# Altium PCB Main.PcbDoc (part 1 of 2)
Units mm, origin at the board's own origin, x right, y up, seen from the top; angles counter-clockwise.
Board outline 112.5 x 86 mm, 4 copper layers (Top Layer, Layer 2, Layer 3, Bottom Layer), stack 1.334 mm thick; 103 components, 96 nets, 354 pads, 15 vias.
Unrouted connection lines stored in the file: 144.
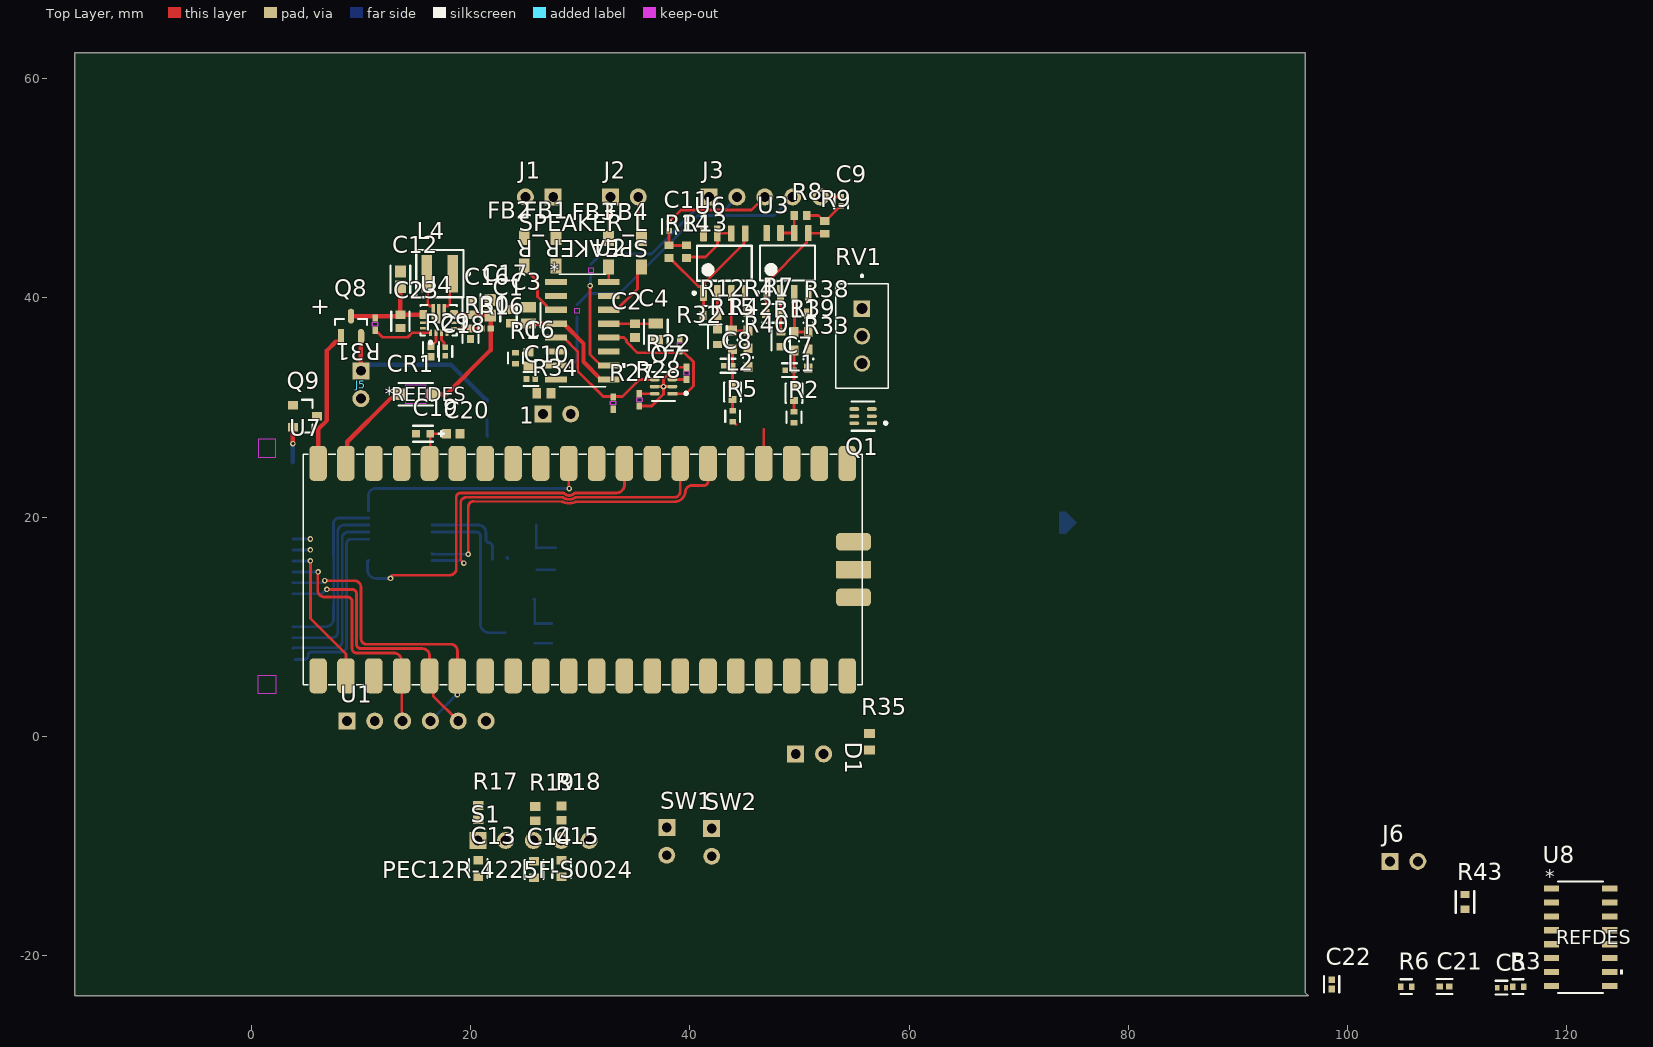
[diagram p0: Top Layer view]
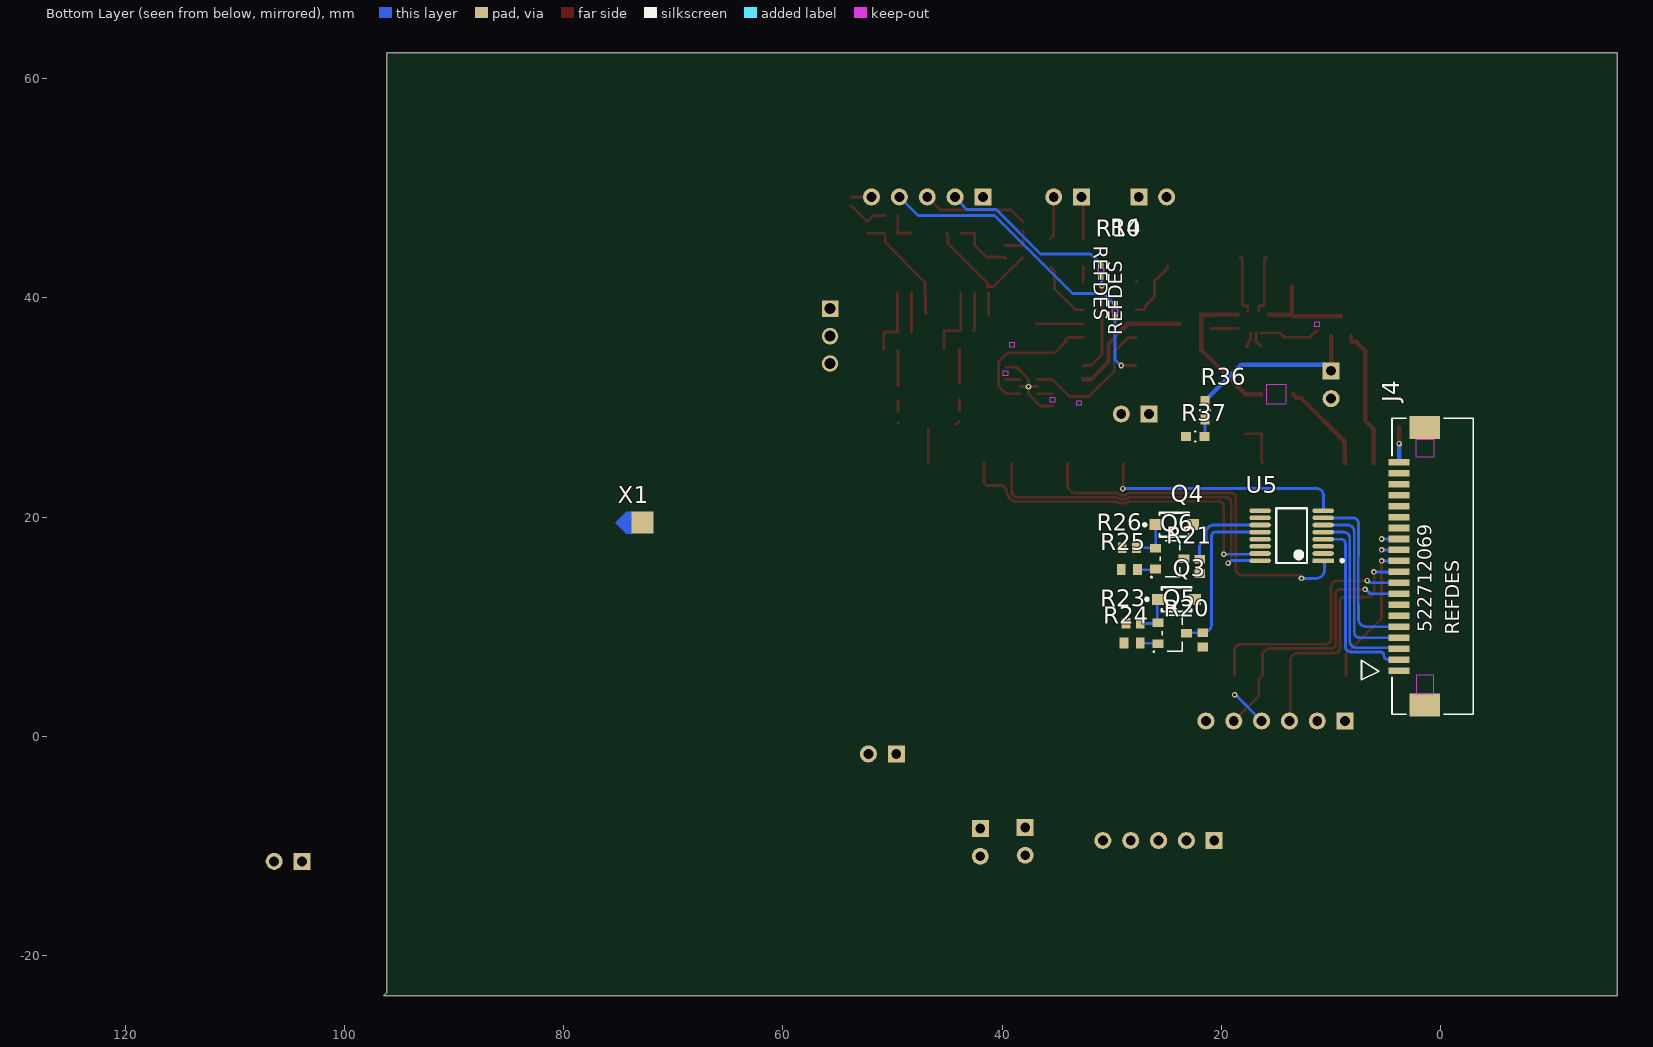
[diagram p1: Bottom Layer view, seen from below]

## Layer stack, top to bottom
Top Solder: solder mask 0.0254, SM-001, Dk 4
Top Layer: signal copper 0.035
Dielectric 1: prepreg 0.1295, PP-017, Dk 4.3
Dielectric 2: prepreg 0.1295, PP-017, Dk 4.3
Layer 2: signal copper 0.0175
Dielectric 3: core 0.7112, Core-039, Dk 4.8
Layer 3: signal copper 0.0175
Dielectric 4: prepreg 0.1295, PP-017, Dk 4.3
Dielectric 5: prepreg 0.1295, PP-017, Dk 4.3
Bottom Layer: signal copper 0.035
Bottom Solder: solder mask 0.0254, SM-001, Dk 4

## Board outline
-16.1,62.35 -16.1,-23.65 96.4,-23.65 96.15,-23.4 96.15,62.35

## Design rules (kind name [scope] priority, off if disabled: settings)
Clearance Keepout_Clearance [IsKeepOut] p1: gap=0 ignorepadtopadclearanceinfootprint=FALSE
Clearance Maya_Clearance [All] p2: gap=0.254 ignorepadtopadclearanceinfootprint=FALSE except(0.1: Arc-Arc Arc-Track Arc-SMDPad Track-Track Track-SMDPad SMDPad-SMDPad)
Clearance [All] p3: gap=0.254 ignorepadtopadclearanceinfootprint=FALSE
PolygonConnect [All] p1: connectstyle=Relief reliefconductorwidth=0.254 reliefentries=4 polygonreliefangle="90 Angle" airgapwidth=0.254
RoutingVias [All] p1: holewidth=0.711 width=1.27 viastyle="Through Hole" minholewidth=0.711 minwidth=1.27 maxholewidth=0.711 maxwidth=1.27
SolderMaskExpansion [All] p1: expansion=0.102 istentingtop=FALSE
SupplyNets "Schematic Supply Nets_2" [InNet('5V_OUT')] p1: voltage=0.000
SupplyNets "Schematic Supply Nets_1" [InNet('3V3_REG')] p2: voltage=0.000
SupplyNets "Schematic Supply Nets" [InNet('GND')] p3: voltage=0.000
Width Width_1 [InNetClass('POWER')] p1: maxlimit=0.4 minlimit=0.254 preferedwidth=0.254 toplayer_minwidth=0.4 midlayer1_maxwidth=0.254 midlayer2_maxwidth=0.254 bottomlayer_minwidth=0.4 minimp=50.000000 maximp=50.000000 favimp=50.000000
Width [All] p2: maxlimit=0.254 minlimit=0.254 preferedwidth=0.254
29 further rules are at their usual default settings.

## Classes and differential pairs
net class POWER: 5V_OUT NetC12_1 NetC16_1 NetJ4_20 NetJ5_1 NetQ8_1
component class Power: C12 C16 C17 C18 C23 CR1 J5 L4 Q8 R16 R29 R30 R31 R36 R37 U4
component class PiPico: C19 C20 U1 U5 U7
component class IO: 1 C13 C14 C15 D1 J4 Q3 Q4 Q5 Q6 Q9 R17 R18 R19 R20 R21 R23 R24 R25 R26 R34 R35 S1 SW1 SW2
component class Audio: C1 C2 C3 C4 C5 C6 C7 C8 C9 C10 C11 C21 C22 FB1 FB2 FB3 FB4 J1 J2 J3 J6 L1 L2 Q1 Q7 R1 R2 R3 R4 R5 R6 R7 R8 R9 R10 R11 R12 R13 R14 R15 R22 R27 R28 R32 R33 R38 R39 R40 R41 R42 R43 RV1 U2 U3 U6 U8 X1

## Components (designator, comment, footprint, x,y, rotation, side; value= is the part's Value field where it differs from the comment)
1 "LDR" "2-pin Header (Generic)" 26.6,29.4 r0 top
C1 "C0603C105K3RACTU" CAPC1608X87X35LL15T15 23.7,38.3 r90 top
C2 "C0603C105K3RACTU" CAPC1608X87X35LL15T15 35,37 r270 top
C3 "C0805C106K8PACTU" FP-C0805C-DG-MFG 25.3,38.4 r270 top value=10uF
C4 "C0805C106K8PACTU" FP-C0805C-DG-MFG 36.9,36.9 r90 top value=10uF
C5 "GRM155R71C104KA88D" FP-GRM15-MFG 114.037,-22.923 r0 top value=0.10μF
C6 "C0603C105K3RACTU" CAPC1608X87X35LL15T15 25.3,34.4 r90 top
C7 "C0402C105K8PACTU" FP-C0402C105K8PACTU-MFG 49.1,33.4 r180 top
C8 "C0402C105K8PACTU" FP-C0402C105K8PACTU-MFG 43.5,33.8 r180 top
C9 "C0402C105K8PACTU" FP-C0402C105K8PACTU-MFG 53.8,48.8 r90 top
C10 "C0402C105K8PACTU" FP-C0402C105K8PACTU-MFG 25.5,32.6 r180 top
C11 "C0402C105K8PACTU" FP-C0402C105K8PACTU-MFG 38.1,46.5 r90 top
C12 "GRM188R60J476ME15D" FP-GRM188-0_2-IPC_B 13.6,41.7 r90 top
C13 "CC0603KRX7R7BB104" FP-CC0603-DA-MFG 20.7,-12.05 r270 top value="100 nF"
C14 "CC0603KRX7R7BB104" FP-CC0603-DA-MFG 25.8,-12.15 r270 top value="100 nF"
C15 "CC0603KRX7R7BB104" FP-CC0603-DA-MFG 28.3,-12.05 r270 top value="100 nF"
C16 "C0603C106M9PACTU" FP-C0603C106M9PACTU-MFG 20.1,39.05 r90 top value=10uF
C17 "GRM188R60J476ME15D" FP-GRM188-0_2-IPC_B 21.8,39.1 r90 top
C18 "C0402C104K8PACTU" FP-C0402-BB-MFG 17.7,35.1 r270 top value="0.10 μF"
C19 "F980G107MMA" FP-F98M-MFG 15.675,27.6 r0 top value=100uF
C20 "C0603C105K3RACTU" CAPC1608X87X35LL15T15 18.425,27.6 r180 top
C21 "GRM1555C1H102JA01D" FP-GRM155-0_05-IPC_B 108.837,-22.823 r0 top
C22 "GRM155R61H474KE11D" FP-GRM155-0_1-IPC_B 98.537,-22.623 r90 top
C23 "C0603C106M9PACTU" FP-C0603C106M9PACTU-MFG 13.6,37.85 r270 top value=10uF
CR1 "MBR120VLSFT1G" SDO_SOD-123FL_ONS 15,31.2 r0 top
D1 "" "2-pin Header (Generic)" 49.66,-1.6 r0 top
FB1 "742792097" WE-CBF_0805_L2W1.2H0.9_HC 27.8,44.2 r90 top
FB2 "742792097" WE-CBF_0805_L2W1.2H0.9_HC 24.9,44.2 r90 top
FB3 "742792097" WE-CBF_0805_L2W1.2H0.9_HC 32.6,44.1 r90 top
FB4 "742792097" WE-CBF_0805_L2W1.2H0.9_HC 35.6,44.1 r90 top
J1 "SPEAKER_L" "2-pin Header (Generic)" 27.54,49.2 r180 top
J2 "SPEAKER_R" "2-pin Header (Generic)" 32.76,49.2 r0 top
J3 "5-PIN HEADER" "5-pin Header (Generic)" 41.76,49.2 r0 top
J4 "522712069" CON_522712069_MOL 0.75,15.5 r90 bottom
J5 "Battery Connection" "2-pin Header (Generic)" 10,33.34 r270 top
J6 "2-PIN HEADER" "2-pin Header (Generic)" 103.86,-11.4 r0 top
L1 "LQM18DH220M70L" FP-LQM18DN_70-MFG 49.5,31.3 r90 top
L2 "LQM18DH220M70L" FP-LQM18DN_70-MFG 43.9,31.4 r90 top
L4 "XFL4020-152MEC" FP-XFL4020-MFG 17.2,42.2 r180 top
Q1 "2N7002DW-7-F" FP-SOT363-IPC_C 55.8,29.2 r180 top
Q3 "TEMT1020" FP-6_544-5325_01-4-MFG 24.1,12.5 r180 bottom
Q4 "TEMT1020" FP-6_544-5325_01-4-MFG 24.3,19.3 r180 bottom
Q5 "2SC2618RCTL-E" PLSP0003ZB-A_P213_MFG 24.5,9.4 r180 bottom
Q6 "2SC2618RCTL-E" PLSP0003ZB-A_P213_MFG 24.7,16.2 r180 bottom
Q7 "2N7002DW-7-F" FP-SOT363-IPC_C 37.601,31.9 r180 top
Q8 "DMG2305UX-7" FP-SOT23-IPC_B 9.1,37.4 r90 top
Q9 "2N7002H6327XTSA2" FP-PG-SOT23-3-MFG 4.9,29.2 r0 top
R1 "RC0402FR-0710RL" FP-RC0402-0_4-MFG 24.1,34.5 r90 top
R2 "RC0402FR-0710RL" FP-RC0402-0_4-MFG 49.5,29.1 r90 top
R3 "RC0402FR-0710RL" FP-RC0402-0_4-MFG 115.537,-22.823 r0 top
R4 "RC0402JR-0710KL" RC0402N_YAG 29.7,38.8 r90 bottom
R5 "RC0402FR-0710RL" FP-RC0402-0_4-MFG 43.9,29.2 r90 top
R6 "RC0402FR-0710RL" FP-RC0402-0_4-MFG 105.337,-22.823 r0 top
R7 "RC0603FR-0710KL" FP-RC0603-0_55-IPC_C 47.605,38.575 r180 top
R8 "CRCW060375R0FKEA" RESC1609X50X30LL10T20 50.1,47.5 r0 top
R9 "CRCW060375R0FKEA" RESC1609X50X30LL10T20 52.3,46.425 r90 top
R10 "RC0402JR-0710KL" RC0402N_YAG 31,42.5 r270 bottom
R11 "RC0603FR-0710KL" FP-RC0603-0_55-IPC_C 48.3,36.2 r90 top
R12 "RC0603FR-0710KL" FP-RC0603-0_55-IPC_C 41.877,38.4 r180 top
R13 "CRCW060375R0FKEA" RESC1609X50X30LL10T20 39.7,44.2 r90 top
R14 "CRCW060375R0FKEA" RESC1609X50X30LL10T20 38.1,44.2 r90 top
R15 "RC0603FR-0710KL" FP-RC0603-0_55-IPC_C 42.515,36.408 r90 top
R16 "RC0402FR-07523KL" RESC1005X40X25NL05T10 21.425,37.2 r0 top
R17 "CRCW060310K0FKEA" RESC1609X50X30NL8T20 20.7,-6.95 r90 top
R18 "CRCW060310K0FKEA" RESC1609X50X30NL8T20 28.3,-7 r90 top
R19 "CRCW060310K0FKEA" RESC1609X50X30NL8T20 25.9,-7.05 r90 top
R20 "CRCW060310K0FKEA" RESC1609X50X30NL8T20 21.7,8.8 r270 bottom
R21 "CRCW060310K0FKEA" RESC1609X50X30NL8T20 22,15.5 r270 bottom
R22 "RC0402JR-0710KL" RC0402N_YAG 39.7,33.109 r270 top
R23 "CRCW060310K0FKEA" RESC1609X50X30NL8T20 28.05,10.3 r180 bottom
R24 "RC0603JR-071KL" RESC1608X55X25ML10T15 28.15,8.5 r180 bottom
R25 "RC0603JR-071KL" RESC1608X55X25ML10T15 28.4,15.2 r180 bottom
R26 "CRCW060310K0FKEA" RESC1609X50X30NL8T20 28.4,17.2 r180 bottom
R27 "RC0402JR-0710KL" RC0402N_YAG 33,30.4 r90 top
R28 "RC0402JR-0710KL" RC0402N_YAG 35.4,30.691 r90 top
R29 "RC0402JR-07100KL" FP-RC0402-0_4-IPC_A 16.4,35.1 r270 top
R30 "RC0402JR-07100KL" FP-RC0402-0_4-IPC_A 20,36.721 r90 top
R31 "RC0402JR-0710KL" RC0402N_YAG 11.3,37.6 r270 top
R32 "RC0402JR-0710KL" RC0402N_YAG 39.1,35.7 r270 top
R33 "RC0603FR-07100KL" FP-RC0603-0_55-MFG 50.805,34.425 r270 top
R34 "CRCW060310K0FKEA" RESC1609X50X30NL8T20 26.7,31.3 r180 top
R35 "RC0603JR-071KL" RESC1608X55X25ML10T15 56.4,-0.5 r90 top
R36 "RC0603FR-07100KL" FP-RC0603-0_55-MFG 21.5,29.75 r90 bottom
R37 "RC0603FR-07100KL" FP-RC0603-0_55-MFG 22.4,27.35 r180 bottom
R38 "RC0603FR-07100KL" FP-RC0603-0_55-MFG 50.805,37.725 r270 top
R39 "RC0603FR-0747KL" FP-RC0603FR-0747KL-MFG 49.505,36.025 r90 top
R40 "RC0603FR-07100KL" FP-RC0603-0_55-MFG 45.3,34.55 r270 top
R41 "RC0603FR-07100KL" FP-RC0603-0_55-MFG 45.3,37.85 r270 top
R42 "RC0603FR-0747KL" FP-RC0603FR-0747KL-MFG 43.9,36.15 r90 top
R43 "RC0603FR-0710KL" FP-RC0603-0_55-IPC_C 110.7,-15.1 r90 top
RV1 "PV36W103C01B00" TRIM_PV36W103C01B00 55.7,36.5 r270 top
S1 "PEC12R-4225F-S0024" "5-pin Header (Generic)" 20.66,-9.5 r0 top
SW1 "BUTTON PANEL-MOUNT" "2-pin Header (Generic)" 37.9,-8.3 r270 top
SW2 "BUTTON PANEL-MOUNT" "2-pin Header (Generic)" 42,-8.4 r270 top
U1 "SD_CARD_READER" "6-pin Header (Generic)" 8.72,1.4 r0 top
U2 "PAM8406DR" SO-16_PAM8406_DIO 30.2,37 r0 top
U3 "NE5532DR" D0008A_N 48.905,43.175 r90 top
U4 "TPS63070RNMR" FP-RNM0015A-MFG 17.1,37.95 r90 top
U5 "TMUX1208PWR" FP-PW0016A-IPC_A 13.6,18.3 r0 bottom
U6 "NE5532DR" D0008A_N 43.15,43.15 r90 top
U7 "RPi_Pico_SM" RPi_Pico_SM 30.23,15.21 r90 top
U8 "SI4732-A10-GS" SOIC_A10-GS_SIL 121.237,-18.323 r0 top
X1 "ANT" FM_ANTENNA_OUT 72.8,19.5 r270 bottom

## Footprints (in the part's own frame and the unit in brackets; to place one, negate y for a bottom-side part, rotate by r counter-clockwise, add the part's x,y. Pads: shape width x height; smd on the part's side, far side on the other; paste and mask are expansions set on the pad)
"2-pin Header (Generic)" [mm] "2 THT pads for generic headers."
  rect 1.55x1.55 hole 0.9: 1(0,0)
  round 1.55 hole 0.9: 2(2.54,0)
"5-pin Header (Generic)" [mm] "5 THT pads for generic headers."
  rect 1.55x1.55 hole 0.9: 1(0,0)
  round 1.55 hole 0.9: 2(2.54,0) 3(5.08,0) 4(7.62,0) 5(10.16,0)
"6-pin Header (Generic)" [mm] "6 THT pads for generic headers. Also used for SD card reader breakout board."
  rect 1.55x1.55 hole 0.9: 1(0,0)
  round 1.55 hole 0.9: 2(2.54,0) 3(5.08,0) 4(7.62,0) 5(10.16,0) 6(12.7,0)
CAPC1608X87X35LL15T15 [mm] "Chip Capacitor, 2-Leads, Body 1.60x0.80mm, IPC High Density"
  rect 0.8x0.9 smd: 1(-0.625,0) 2(0.625,0)
  body extent -0.87,-0.48 0.87,0.48, height 0.87
CON_522712069_MOL [mm]
  rect 0.6x1.9 smd paste+0 mask+0.076: 1(-9.5,3.05) 2(-8.5,3.05) 3(-7.5,3.05) 4(-6.5,3.05) 5(-5.5,3.05) 6(-4.5,3.05) 7(-3.5,3.05) 8(-2.5,3.05) 9(-1.5,3.05) 10(-0.5,3.05) 11(0.5,3.05) 12(1.5,3.05) 13(2.5,3.05) 14(3.5,3.05) 15(4.5,3.05) 16(5.5,3.05) 17(6.5,3.05) 18(7.5,3.05) 19(8.5,3.05) 20(9.5,3.05)
  rect 2.1x2.8 smd paste+0 mask+0.076: P1(-12.65,0.7) P2(12.65,0.7)
  Keep-Out Layer region: -9.95,-0.1 -9.95,1.5 -11.6,1.5 -11.6,-0.1
  Keep-Out Layer region: 9.95,-0.1 9.95,1.5 11.6,1.5 11.6,-0.1
  silkscreen extent -13.5,-3.7 13.5,6.48
D0008A_N [mm] "SOIC, 8-Leads, Body 5x4mm, Pitch 1.27mm, IPC Medium Density"
  rrect17% 1.45x0.6 smd: 1(-2.725,1.905) 2(-2.725,0.635) 3(-2.725,-0.635) 4(-2.725,-1.905) 5(2.725,-1.905) 6(2.725,-0.635) 7(2.725,0.635) 8(2.725,1.905)
  silkscreen extent -2.85,-2.5 1.6,2.88, body extent -3,-2.45 3,2.45, height 1.63
FM_ANTENNA_OUT [mm] "Intended for board-edge mounting"
  rect 2x2 smd paste+0 mask+0: 1(0,0)
  Top Layer region: -1,-0.9 -1,-1.5 0,-2.5 1,-1.5 1,-0.9
FP-6_544-5325_01-4-MFG [mm]
  rect 1.1x1 smd paste+0 mask+0: 1(-1.7,0) 2(1.7,0)
  silkscreen extent -2.83,-1.1 1.35,1.1, body extent -2,-1.01 2,0.99, height 2.89
FP-C0402-BB-MFG [mm]
  rect 0.52x0.52 smd paste+0 mask+0: 1(-0.4,0) 2(0.4,0)
  silkscreen extent -0.5,-0.64 0.5,0.64, body extent -0.8,-0.4 0.8,0.4, height 0.25
FP-C0402C105K8PACTU-MFG [mm]
  rect 0.52x0.52 smd paste+0 mask+0: 1(-0.4,0) 2(0.4,0)
  silkscreen extent -0.67,-0.64 0.67,0.64, body extent -0.8,-0.4 0.8,0.4, height 0.25
FP-C0603C106M9PACTU-MFG [mm]
  rect 0.75x0.9 smd paste+0 mask+0: 1(-0.6,0) 2(0.6,0)
  silkscreen extent -0.88,-0.83 0.87,0.82, body extent -1.2,-0.6 1.2,0.6, height 0.25
FP-C0805C-DG-MFG [mm]
  rect 0.95x1.35 smd paste+0 mask+0: 1(-0.75,0) 2(0.75,0)
  silkscreen extent -1.11,-1.08 1.1,1.07, body extent -1,-0.63 1,0.63, height 1.4
FP-CC0603-DA-MFG [mm]
  rect 0.8x0.9 smd paste+0 mask+0: 1(-0.75,0) 2(0.75,0)
  silkscreen extent -0.85,-0.85 0.85,0.85, body extent -1.35,-0.75 1.35,0.75, height 0.25
FP-F98M-MFG [mm]
  rect 0.7x0.65 smd paste+0 mask+0: 1(-0.65,0) 2(0.65,0)
  silkscreen extent -0.9,-0.72 1.9,0.72, body extent -1.1,-0.63 1.1,0.63, height 0.25
FP-GRM15-MFG [mm]
  rect 0.4x0.5 smd paste+0 mask+0: 1(-0.4,0) 2(0.4,0)
  silkscreen extent -0.53,-0.63 0.53,0.63, body extent -0.7,-0.38 0.7,0.38, height 0.25
FP-GRM155-0_1-IPC_B [mm]
  rect 0.615x0.572 smd paste+0 mask+0: 1(-0.429,0) 2(0.429,0)
  silkscreen extent -0.74,-0.69 0.74,0.69, body extent -0.89,-0.44 0.89,0.44, height 0.25
FP-GRM155-0_05-IPC_B [mm]
  rect 0.615x0.572 smd paste+0 mask+0: 1(-0.429,0) 2(0.429,0)
  silkscreen extent -0.74,-0.69 0.74,0.69, body extent -0.89,-0.44 0.89,0.44, height 0.25
FP-GRM188-0_2-IPC_B [mm]
  rect 1.105x1.006 smd paste+0 mask+0: 1(-0.701,0) 2(0.701,0)
  silkscreen extent -1.25,-0.9 1.25,0.9, body extent -1.5,-0.75 1.5,0.75, height 0.25
FP-LQM18DN_70-MFG [mm]
  rect 0.65x0.7 smd paste+0 mask+0: 1(-0.675,0) 2(0.675,0)
  silkscreen extent -0.87,-0.77 0.87,0.77, body extent -1.1,-0.58 1.1,0.58, height 0.25
FP-PG-SOT23-3-MFG [mm]
  rect 0.9x0.8 smd paste+0 mask+0: 1(-1.1,1) 2(-1.1,-1) 3(1.1,0)
  silkscreen extent -0.28,-1.5 0.7,1.5, body extent -1.92,-1.32 -0.87,1.32, height 3.47
FP-PW0016A-IPC_A [mm]
  rect 1.955x0.421 smd paste+0 mask+0: 1(-2.875,2.275)
  rrect100% 1.955x0.421 smd paste+0 mask+0: 2(-2.875,1.625) 3(-2.875,0.975) 4(-2.875,0.325) 5(-2.875,-0.325) 6(-2.875,-0.975) 7(-2.875,-1.625) 8(-2.875,-2.275) 9(2.875,-2.275) 10(2.875,-1.625) 11(2.875,-0.975) 12(2.875,-0.325) 13(2.875,0.325) 14(2.875,0.975) 15(2.875,1.625) 16(2.875,2.275)
  silkscreen extent -4.73,-2.5 1.4,2.5, body extent -3.2,-2.5 3.2,2.5, height 1.2
FP-RC0402-0_4-IPC_A [mm]
  rect 0.715x0.672 smd paste+0 mask+0: 1(-0.479,0) 2(0.479,0)
  silkscreen extent -0.84,-0.74 0.84,0.74, body extent -1.04,-0.54 1.04,0.54, height 0.25
FP-RC0402-0_4-MFG [mm]
  rect 0.5x0.6 smd paste+0 mask+0: 1(-0.5,0) 2(0.5,0)
  silkscreen extent -0.5,-0.67 0.5,0.67, body extent -0.85,-0.4 0.85,0.4, height 0.25
FP-RC0603-0_55-IPC_C [mm]
  rect 0.659x0.812 smd paste+0 mask+0: 1(-0.677,0) 2(0.677,0)
  silkscreen extent -1.01,-0.85 1.01,0.85, body extent -1.11,-0.55 1.11,0.55, height 0.25
FP-RC0603-0_55-MFG [mm]
  rect 0.9x0.8 smd paste+0 mask+0: 1(-0.85,0) 2(0.85,0)
  silkscreen extent -0.03,-0.45 0.03,0.45, body extent -1.4,-0.55 1.4,0.55, height 0.25
FP-RC0603FR-0747KL-MFG [mm]
  rect 0.9x0.8 smd paste+0 mask+0: 1(-0.85,0) 2(0.85,0)
  silkscreen extent -0.03,-0.45 0.03,0.45, body extent -1.4,-0.55 1.4,0.55, height 0.25
FP-RNM0015A-MFG [mm]
  rrect40% 0.6x0.25 smd paste+0 mask-1000: 1(-1.15,0.75) 2(-1.15,0.25) 3(-1.15,-0.25) 4(-1.15,-0.75)
  rrect40% 0.25x0.6 smd paste+0 mask-1000: 5(-0.725,-1.4) 6(-0.225,-1.4) 14(-0.225,1.4) 15(-0.725,1.4)
  rrect29% 0.85x0.7 smd paste-1000 mask-1000: 7-8(0.525,-1.4) 12-13(0.525,1.4)
  rrect57% 1.45x0.35 smd paste-1000 mask-1000: 9(0.775,-0.5) 11(0.775,0.5)
  rrect57% 1.8x0.35 smd paste-1000 mask-1000: 10(0.6,0)
  silkscreen extent -2.15,-1.65 1.4,1.65, body extent -1.55,-1.85 1.6,1.85, height 0.25
FP-SOT23-IPC_B [mm]
  rect 1.359x0.587 smd paste+0 mask+0: 1(-0.927,0.915)
  rrect100% 1.359x0.587 smd paste+0 mask+0: 2(-0.927,-0.915) 3(0.927,0)
  silkscreen extent 0.13,-1.45 0.65,1.45, body extent -1.86,-1.7 1.86,1.7, height 0.25
FP-SOT363-IPC_C [mm]
  rect 0.91x0.332 smd paste+0 mask+0: 1(-0.801,0.65)
  rrect100% 0.91x0.332 smd paste+0 mask+0: 2(-0.801,0) 3(-0.801,-0.65) 4(0.801,-0.65) 5(0.801,0) 6(0.801,0.65)
  silkscreen extent -2.18,-1.33 1.05,1.33, body extent -1.05,-1.07 1.05,1.07, height 1.1
FP-XFL4020-MFG [mm]
  rect 0.98x3.4 smd paste+0 mask+0: 1(-1.185,0) 2(1.185,0)
  silkscreen extent -2.73,-2.15 2.15,2.15, body extent -2.25,-2.25 2.25,2.25, height 0.25
PLSP0003ZB-A_P213_MFG [mm] "Recommended Land Pattern"
  rect 1x0.8 smd: 1(-1.3,-0.95) 2(-1.3,0.95) 3(1.3,0)
  silkscreen extent -1.74,-1.74 0.9,1.63, body extent -1.4,-1.45 1.4,1.45, height 1.3
RC0402N_YAG [mil]
  rect 26x20 smd paste+0 mask+0: 1(-22,0) 2(22,0)
  Top Layer keep-out region: -7,-8 -7,8 7,8 7,-8
  Keep-Out Layer region: -7,-10 -7,10 7,10 7,-10
  body extent -21,-10 21,10, height 28
RESC1005X40X25NL05T10 [mm] "Chip Resistor, 2-Leads, Body 1.00x0.50mm, IPC Medium Density"
  rect 0.6x0.55 smd: 1(-0.425,0) 2(0.425,0)
  body extent -0.53,-0.27 0.53,0.28, height 0.4
RESC1608X55X25ML10T15 [mm] "Chip Resistor, 2-Leads, Body 1.60x0.80mm, IPC Low Density"
  rect 0.8x1 smd: 1(-0.75,0) 2(0.75,0)
  body extent -0.85,-0.45 0.85,0.45, height 0.55
RESC1609X50X30LL10T20 [mm] "Chip Resistor, 2-Leads, Body 1.55x0.85mm, IPC High Density"
  rect 0.7x0.85 smd: 1(-0.575,0) 2(0.575,0)
  body extent -0.82,-0.48 0.82,0.48, height 0.5
RESC1609X50X30NL8T20 [mm] "Chip Resistor, 2-Leads, Body 1.65x0.95mm, IPC Medium Density"
  rect 0.8x0.95 smd: 1(-0.65,0) 2(0.65,0)
  body extent -0.82,-0.48 0.82,0.48, height 0.5
RPi_Pico_SM [mm]
  rrect50% 3.2x1.6 smd: 1(-9.69,24.13) 2(-9.69,21.59) 3(-9.69,19.05) 4(-9.69,16.51) 5(-9.69,13.97) 6(-9.69,11.43) 7(-9.69,8.89) 8(-9.69,6.35) 9(-9.69,3.81) 10(-9.69,1.27) 11(-9.69,-1.27) 12(-9.69,-3.81) 13(-9.69,-6.35) 14(-9.69,-8.89) 15(-9.69,-11.43) 16(-9.69,-13.97) 17(-9.69,-16.51) 18(-9.69,-19.05) 19(-9.69,-21.59) 20(-9.69,-24.13) 21(9.69,-24.13) 22(9.69,-21.59) 23(9.69,-19.05) 24(9.69,-16.51) 25(9.69,-13.97) 26(9.69,-11.43) 27(9.69,-8.89) 28(9.69,-6.35) 29(9.69,-3.81) 30(9.69,-1.27) 31(9.69,1.27) 32(9.69,3.81) 33(9.69,6.35) 34(9.69,8.89) 35(9.69,11.43) 36(9.69,13.97) 37(9.69,16.51) 38(9.69,19.05) 39(9.69,21.59) 40(9.69,24.13)
  rrect50% 1.6x3.2 smd: D1(-2.54,-24.7) D3(2.54,-24.7)
  rrect12% 1.6x3.2 smd: D2(0,-24.7)
  silkscreen extent -10.5,-25.5 10.5,25.5
SDO_SOD-123FL_ONS [mil]
  rect 45x43 smd paste+0 mask+0: 1(-60.5,0) 2(60.5,0)
  Top Layer keep-out region: -36,-33.5 -36,33.5 36,33.5 36,-33.5
  Keep-Out Layer region: -36,-33.5 -36,33.5 36,33.5 36,-33.5
  silkscreen extent -62,-40 62,40, body extent -75,-36 75,36, height 39
SO-16_PAM8406_DIO [mil]
  rect 78x22 smd paste+0 mask+0: 1(-95,175) 2(-95,125) 3(-95,75) 4(-95,25) 5(-95,-25) 6(-95,-75) 7(-95,-125) 8(-95,-175) 9(95,-175) 10(95,-125) 11(95,-75) 12(95,-25) 13(95,25) 14(95,75) 15(95,125) 16(95,175)
  silkscreen extent -84,-202 154,202, body extent -120,-197 120,197, height 50
SOIC_A10-GS_SIL [mil]
  rect 55x22 smd paste+0 mask+0: 1(-104.5,175) 2(-104.5,125) 3(-104.5,75) 4(-104.5,25) 5(-104.5,-25) 6(-104.5,-75) 7(-104.5,-125) 8(-104.5,-175) 9(104.5,-175) 10(104.5,-125) 11(104.5,-75) 12(104.5,-25) 13(104.5,25) 14(104.5,75) 15(104.5,125) 16(104.5,175)
  silkscreen extent -82,-200 152,200, body extent -118,-195 118,195, height 69
TRIM_PV36W103C01B00 [mm]
  rect 1.508x1.508 / inner round 1.508 / far side rect 1.508x1.508 hole 1: 1(-2.5,0)
  round 1.508 hole 1: 2(0,0) 3(2.5,0)
  silkscreen extent -5.6,-2.41 4.76,2.42, body extent -4.76,-2.41 4.76,2.42, height 11.55
WE-CBF_0805_L2W1.2H0.9_HC [mm] "SMD EMI Suppression Ferrite  Bead, body 2.00x1.20mm"
  rect 1.4x1 smd: 1(-1.3,0) 2(1.3,0)
  body extent -1,-0.6 1,0.6, height 0.9

## Part data
1: library part "PHOTORESISTOR GENERIC", "Generic Photoresistor symbol for peripheral use. / Uses generic 2-Pin Header footprint."
C1 C2 C6 C20: library part CMP-2006-03713-1, Manufacturer=Kemet, Part Number=C0603C105K3RACTU
C3 C4: library part CMP-2007-03243-2, "CAP CER 10UF 10V X5R 0805", 3DS Part Number=220-00001, Capacitance=10uF, Manufacturer=Kemet, Package=C0805C-DG, Temperature="-55°C to +85°C", Temperature Characteristic=X5R, Temperature Coefficient=15%, Temperature Range High=+85°C, Temperature Range Low=-55°C, Tolerance=10%, Voltage=10V, Automotive=No, Category=Cap, ComponentLink2Description=Datasheet, ComponentLink2URL=https://content.kemet.com/datasheets/KEM_C1006_X5R_SMD.pdf, Device Class L1="Passive Components", Device Class L2=Capacitors, Device Class L3="Ceramic Capacitors", Digikey Description="CAP CER 10UF 10V X5R 0805", Height=1.4mm, Ipc Land Pattern Name=CAPC200125X125, Lead Free=Yes, Manufacturer Part Number=C0805C106K8PACTU, Material=Ceramic, Mouser Description="CAP CER 10UF 10V X5R 0805", Octopart=https://octopart.com/c0805c106k8pactu-kemet-98697, RoHS=TRUE, Voltage Rating=10V
C5: library part CMP-2100-03641-2, "CAP CER 0.1UF 16V X7R 0402", Capacitance=0.10μF, Manufacturer=Murata, Package=GRM15, Temperature="-55°C to +125°C", Temperature Characteristic=X7R, Temperature Range High=+125°C, Temperature Range Low=-55°C, Tolerance=10%, Voltage Rating=16Vdc, Category=Cap, ComponentLink2Description=Datasheet, ComponentLink2URL=https://search.murata.co.jp/Ceramy/image/img/A01X/G101/ENG/GRM155R71H471KA01-01A.pdf, Device Class L1="Passive Components", Device Class L2=Capacitors, Device Class L3="Ceramic Capacitors", Digikey Description="CAP CER 0.1UF 16V X7R 0402", Height=0.55mm, Ipc Land Pattern Name=CAPC10050X219, Lead Free=yes, Manufacturer Part Number=GRM155R71C104KA88D, Material=Ceramic, Mouser Description="0402 0.1 uF 16V ±10 % Tolerance X7R SMT Multilayer Ceramic Capacitor", Octopart=https://octopart.com/grm155r71c104ka88d-murata-196880, RoHS=TRUE, Standoff Height=0mm
C7 C8 C9 C10 C11: library part CMP-2008-02081-2, "CAP CER 1UF 10V X5R 0402", Capacitance=1uF, Case Code (Imperial)=0402, Case Code (Metric)=1005, Dielectric=X5R, Dielectric Material=Ceramic, Max Operating Temperature=85°C, Min Operating Temperature=-55°C, Package Quantity=1, Tolerance=10%, Voltage=10V, Case/Package=0402, Construction=Flat, Contact Plating=Tin, Depth=0.5mm, Dissipation Factor=5%, Height=0.5mm, Lead Free="Lead Free", Length=1mm, Mount="Surface Mount", Number of Pins=2, Packaging="Tape and Reel", Radiation Hardening=No, REACH SVHC="No SVHC", RoHS Compliant=Yes, Series=C, Termination=SMD/SMT, Thickness=0.022inch, Voltage Rating=10V, Voltage Rating (DC)=10V, Width=0.5mm
C12 C17: library part CMP-2000-05444-2, "Chip Multilayer Ceramic Capacitors for General Purpose, 0603, 47uF, X5R, 15%, 20%, 6.3V", Capacitance=47uF, Case Code (Imperial)=0603, Case Code (Metric)=1608, Dielectric=X5R, Max Operating Temperature=85°C, Min Operating Temperature=-55°C, Tolerance=20%, Voltage Rating=6.3V, Case/Package=0603, Length=0.063inch, Mount="Surface Mount", Packaging="Tape and Reel", Thickness=0.039inch, Voltage Rating (DC)=6.3V, Width=0.031inch
C13 C14 C15: library part CMP-2000-05002-2, "CAP CER 0.1UF 16V X7R 0603", Capacitance="100 nF", Manufacturer=YAGEO, Package=CC0603-DA, Temperature="-55°C to +125°C", Temperature Characteristic=X7R, Temperature Coefficient=15%, Temperature Range High=+125°C, Temperature Range Low=-55°C, Tolerance=0.1, Voltage="16 V", Automotive=No, Category=Cap, ComponentLink2Description=Datasheet, ComponentLink2URL=http://www.yageo.com/documents/recent/UPY-GPHC_X7R_6.3V-to-50V_18.pdf, Device Class L1="Passive Components", Device Class L2=Capacitors, Device Class L3="Ceramic Capacitors", Digikey Description="CAP CER 0.1UF 16V X7R 0603", Footprint Url=http://www.yageo.com/exep/pages/download/literatures/UPY-C_GEN_24.pdf, Height=0.9mm, Lead Free=Yes, Manufacturer Part Number=CC0603KRX7R7BB104, Material=Ceramic, Mouser Description="Multilayer Ceramic Capacitor, CC Series, 0.1 - F, - 10%, X7R, 16 V, 0603 [1608 Metric]", Octopart=https://octopart.com/cc0603krx7r7bb104-yageo-192941, RoHS=TRUE, Voltage Rating="16 V"
C16 C23: library part CMP-2006-02285-3, "CAP CER 10UF 6.3V X5R 0603", Capacitance=10uF, Manufacturer=Kemet, Temperature="-55°C to +85°C", Temperature Characteristic=X5R, Temperature Coefficient=15%, Temperature Range High=+85°C, Temperature Range Low=-55°C, Tolerance=20%, Voltage Rating=6.3V, Automotive=No, Category=Cap, ComponentLink2Description=Datasheet, ComponentLink2URL=http://www.kemet.com/Lists/ProductCatalog/Attachments/19/KEM_C1006_X5R_SMD.pdf, Device Class L1="Passive Components", Device Class L2=Capacitors, Device Class L3="Ceramic Capacitors", Digikey Description="CAP CER 10UF 6.3V X5R 0603", Height=0.9mm, Ipc Land Pattern Name=CAPC16080X80, Lead Free=Yes, Manufacturer Part Number=C0603C106M9PACTU, Material=Ceramic, Mouser Description="In a Pack of 10, KEMET 0603 (1608M) 10µF MLCC 6.3V dc ±20% SMD C0603C106M9PACTU", Octopart=https://octopart.com/c0603c106m9pactu-kemet-8375727, Package=C0603C106M9PACTU, RoHS=TRUE
C18: library part CMP-2008-02046-2, "CAP CER 0.1UF 10V X5R 0402", Capacitance="0.10 μF", Manufacturer=Kemet, Package=C0402-BB, Temperature="-55°C to +125°C", Temperature Characteristic=X5R, Temperature Coefficient=15%, Temperature Range High=+125°C, Temperature Range Low=-55°C, Tolerance=0.1, Voltage Rating="10 V", Automotive=No, Category=Cap, ComponentLink2Description=Datasheet, ComponentLink2URL=https://content.kemet.com/datasheets/KEM_C1002_X7R_SMD.pdf, Device Class L1="Passive Components", Device Class L2=Capacitors, Device Class L3="Ceramic Capacitors", Digikey Description="CAP CER 0.1UF 10V X5R 0402", Height=0.55mm, Ipc Land Pattern Name=CAPC10050X50, Lead Free=Yes, Manufacturer Part Number=C0402C104K8PACTU, Material=Ceramic, Mouser Description="Capacitor 100 nF 10 VDC 0402", Octopart=https://octopart.com/c0402c104k8pactu-kemet-140039, RoHS=TRUE
C19: library part CMP-04424-000012-1, "CAP TANT 100UF 20% 4V 0603", Capacitance=100uF, Leakage Current=80uA, Manufacturer="AVX Corporation", Package=F98M, Ripple Current=50mA, Temperature="-55°C to +125°C", Temperature Coefficient=30%, Temperature Range High=+125°C, Temperature Range Low=-55°C, Tolerance=20%, Voltage Rating=4V, Automotive=No, Category=Cap, ComponentLink2Description=Datasheet, ComponentLink2URL=http://datasheets.avx.com/F98.pdf, Device Class L1="Passive Components", Device Class L2=Capacitors, Device Class L3="Tantalum Capacitors", Digikey Description="CAP TANT 100UF 20% 4V 0603", Dissipation Factor=60%, Esr=10Ω, Footprint Url=http://www.avx.com/download/software/literature/AVX-Footprint-Library.pdf, Height=0.9mm, Lead Free=Yes, Life=1000Hours, Manufacturer Part Number=F980G107MMA, Material=Tantalum, Octopart=https://octopart.com/f980g107mma-avx-28870482, RoHS=TRUE
C21: library part CMP-2008-04254-2, "Chip Multilayer Ceramic Capacitors for General Purpose, 0402, 1000pF, C0G, 30ppm/°C, 5%, 50V", Capacitance=1nF, Case Code (Imperial)=0402, Case Code (Metric)=1005, Dielectric=C0G, Dielectric Material=Ceramic, Insulation Resistance=10GR, Max Operating Temperature=125°C, Min Operating Temperature=-55°C, Package Quantity=1, Temperature Coefficient=30ppm/°C, Tolerance=5%, Voltage=50V, Case/Package=0402, Depth=0.5mm, Height=0.5mm, Lead Free="Lead Free", Length=1mm, Material=Ceramic, Mount="Surface Mount", Number of Pins=2, Packaging="Tape and Reel", Radiation Hardening=No, REACH SVHC="No SVHC", Termination=SMD/SMT, Thickness=0.022inch, Voltage Rating=50V, Voltage Rating (DC)=50V, Width=0.5mm
C22: library part CMP-06035-008741-1, "Chip Multilayer Ceramic Capacitors for General Purpose, 0402, 0.47uF, X5R, 15%, 10%, 50V", Capacitance=470nF, Dielectric=X5R, Tolerance=10%, Voltage Rating (DC)=50V, Length=1mm, Thickness=500um, Width=500um
CR1: "No Description Available", Mfr_Name=onsemi
D1: library part APT1608SF4C-PRV, "IR_LED", Package=None, Availability=Unavailable, MF="{'manufacturer': u'Kingbright'}", MP=APT1608SF4C-PRV, Price=None
FB1 FB2 FB3 FB4: library part CMP-0220-00149-3, Case Code (Imperial)=0805, Case Code (Metric)=2012, Current Rating=1A, DC Resistance (DCR)=300mΩ, Inductance=1.8nH, Max Operating Temperature=125°C, Min Operating Temperature=-55°C, Test Frequency=100MHz, Tolerance=25%, Case/Package=0805, Core Material=Ferrite, Depth=1.2mm, Height=900µm, Impedance=1.5kΩ, Lead Free="Lead Free", Length=2mm, Material=Ferrite, Max Current Rating=1A, Max DC Current=1A, Mount="Surface Mount", NexarPartId=22803129, Number of Lines=1, Packaging=Digi-Reel®, REACH SVHC=Unknown, Resistance=300mΩ, RMS Current (Irms)=1A, RoHS=Compliant, Series Resistance=300mΩ, Termination=SMD/SMT, Weight=10.999615mg, Width=1.2mm
J1 J2 J5: library part "2-PIN HEADER"
J4: Mfr_Name="Molex Connector Corporation", RefDes=RefDes, Type=Type
L1 L2: library part CMP-00260-119446615-1, "LQM18DH220M70L Inductor Chip Shielded Multilayer 22uH 20% 1MHz Ferrite 200mA 0603 Emboss T/R", Case/Package=0603, Inductance=22µH, Max Operating Temperature=150°C, Min Operating Temperature=-55°C, Resistance=3.12Ω, RMS Current (Irms)=200mA, Saturation Current=50mA, Self Resonant Frequency=15MHz, Test Frequency=1MHz, Tolerance=20%, Core Material=Ferrite, Height=950µm, Lifecycle Status=Production, NexarPartId=119446615, Series Resistance=3.12Ω
L4: library part CMP-11268-000104-1, "Inductor Power Shielded Wirewound 1.5uH 20% 100KHz 9.1A 15.8mOhm DCR 1515 Automotive Embossed Plastic T/R", Case/Package=SMD/SMT, DC Resistance (DCR)=15.8mR, Inductance=1.5uH, Inductance Tolerance=20%, Max DC Current=9.1A, Max Operating Temperature=125°C, Min Operating Temperature=-40°C, Saturation Current=4.1A, Self Resonant Frequency=59MHz, Test Frequency=100kHz, Core Material=Composite, Height=2.1mm, Lead Free="Contains Lead", Length=4.3mm, Mount="Surface Mount", Packaging="Tape and Reel", REACH SVHC="No SVHC", RMS Current (Irms)=9.1A, RoHS Compliant=Yes, Series=XFL4020, Shielding=Shielded, Termination=SMD/SMT, Tolerance=20%, Width=4.3mm
Q1 Q7: library part CMP-2000-05563-2, "MOSFET 2N-CH 60V 0.23A SOT-363", Case/Package=SOT-363, Continuous Drain Current (ID)=115mA, Drain To Source Breakdown Voltage=70V, Drain To Source Resistance=4.4R, Drain to Source Voltage (Vdss)=60V, Gate to Source Voltage (Vgs)=20V, Input Capacitance=50pF, Max Operating Temperature=150°C, Max Power Dissipation=200mW, Min Operating Temperature=-55°C, On-State Resistance=7.5R, Package Quantity=3000, Power Dissipation=400mW, Threshold Voltage=2V, Contact Plating=Tin, Current Rating=115mA, Dual Supply Voltage=60V, Element Configuration=Dual, FET Type="2 N-Channel", Height=1mm, Lead Free="Lead Free", Length=2.2mm, Mount="Surface Mount", Nominal Vgs=2V, Number Of Channels=2, Number of Elements=2, Number of Pins=6, Packaging="Tape and Reel", Radiation Hardening=No, Rds On Max=7.5R, REACH SVHC="No SVHC", Termination=SMD/SMT, Turn-Off Delay Time=11ns, Turn-On Delay Time=7ns, Voltage Rating (DC)=60V, Weight=0.000212oz, Width=1.35mm
Q3 Q4: library part CMP-02533-000001-1, "SENSOR PHOTO 880NM TOP VIEW 2SMD", Ambient Temperature Range High=+85°C, Ambient Temperature Range Low=-40°C, Collector Emitter Breakdown Voltage=70V, Dark Current=0.001uA, Manufacturer="Vishay Semiconductor Opto Division", Max Collector Current=50mA, Max Junction Temp=+100°C, Operating Supply Current=7mA, Package=6.544-5325.01-4, Power Dissipation=100mW, Temperature="to +100°C", Automotive=No, Category=Trans, ComponentLink2Description=Datasheet, ComponentLink2URL=http://www.vishay.com/doc?81554, Device Class L1=Sensors, Device Class L2="Optical Sensors", Device Class L3=Phototransistor, Digikey Description="SENSOR PHOTO 880NM TOP VIEW 2SMD", Height=2.98mm, Lead Free=Yes, Led Orientation="Top View", Manufacturer Part Number=TEMT1020, Mouser Description="Phototransistors NPN Phototransistor", Octopart=https://octopart.com/temt1020-vishay-39666707, RoHS=TRUE, Standoff Height=0.08mm, Temperature Range High=+100°C, Viewing Angle=30°, Wavelength=880nm
Q5 Q6: library part CMP-00572-10406399-1, "Trans Gp Bjt NPN 35V 0.5A 3-PIN Mpak T/r", Collector Base Voltage (VCBO)=35V, Emitter Base Voltage (VEBO)=4V, Manufacturer Lifecycle Status=OBSOLETE, Max Operating Temperature=150°C, Min Operating Temperature=-55°C, Power Dissipation=150mW, China RoHS=Compliant, Collector Emitter Voltage (VCEO)=35V, ComponentLink1Description="Manufacturer's Website", ComponentLink1URL=http://www.renesas.com, ComponentLink2Description="Datasheet URL", ComponentLink2URL=https://octopart.com/cad-content/api/get-model-datasheet/15189/10406399, ComponentLink3Description="Manufacturer's Package Drawing", ComponentLink3URL=https://www.renesas.com/en/document/psc/package-drawing-mpak-3pin-plsp0003zb, Height=1.3mm, HelpURL=https://octopart.com/cad-content/api/get-model-datasheet/15189/10406399, Lead Free="Lead Free", Length=2mm, Lifecycle Status=Obsolete, Mount="Surface Mount", Number of Elements=1, Number of Pins=3, Polarity=NPN, Radiation Hardening=No, RoHS=Compliant, Width=3mm
Q8: library part CMP-1693-00002-4, "MOSFET P-CH 20V 4.2A SOT23", Case/Package=SOT-23, Continuous Drain Current (ID)=4.2A, Drain To Source Resistance=200mR, Drain to Source Voltage (Vdss)=20V, Gate to Source Voltage (Vgs)=8V, Input Capacitance=808pF, Max Operating Temperature=150°C, Max Power Dissipation=1.4W, Min Operating Temperature=-55°C, On-State Resistance=52MR, Package Quantity=3000, Threshold Voltage=-900mV, Contact Plating=Tin, Element Configuration=Single, Fall Time=34.7ns, Height=1.1mm, Lead Free="Lead Free", Length=3mm, Mount="Surface Mount", Number Of Channels=1, Number of Pins=3, Packaging="Tape and Reel", Radiation Hardening=No, Rds On Max=52mR, REACH SVHC="No SVHC", Rise Time=13.7ns, Turn-Off Delay Time=79.3ns, Turn-On Delay Time=10.8ns, Weight=0.000282oz, Width=1.4mm
Q9: library part CMP-32901-000180-1, "MOSFET N-CH 60V 0.3A SOT23", Case/Package=SOT-23, Continuous Drain Current (ID)=300mA, Drain to Source Voltage (Vdss)=60V, Gate to Source Voltage (Vgs)=20V, Input Capacitance=20pF, Max Operating Temperature=150°C, Max Power Dissipation=500mW, Min Operating Temperature=-55°C, Halogen Free="Halogen Free", Lead Free="Lead Free", Max Dual Supply Voltage=60V, Mount="Surface Mount", Number of Pins=3, Packaging="Tape and Reel", Rds On Max=3R, Rise Time=3.3ns
R1 R2 R3 R5 R6: library part CMP-2002-07358-2, Case Code (Imperial)=0402, Max Operating Temperature=155°C, Min Operating Temperature=-55°C, Power Rating=63mW, Resistance=10Ω, Temperature Coefficient=100ppm/°C, Tolerance=1%, Voltage Rating=50V, Case Code (Metric)=0402, Case/Package=0402, Composition="Thick Film", Depth=500µm, Height=320µm, Lead Free="Lead Free", Length=1mm, Military Standard=Not, NexarPartId=55458463, Number of Pins=2, Number of Terminations=2, Packaging="Tape & Reel", REACH SVHC=Unknown, RoHS=Compliant, Schedule B="8533210045, 8533210045", Termination=SMD/SMT, Voltage Rating (AC)=50V, Voltage Rating (DC)=50V, Width=500µm, Working Voltage=50V
R4 R10 R22 R27 R28 R31 R32: library part CMP-2002-07915-3, "RES 10K OHM 5% 1/16W 0402", Case Code (Imperial)=0402, Case Code (Metric)=1005, Max Operating Temperature=155°C, Max Power Dissipation=63mW, Min Operating Temperature=-55°C, Package Quantity=1, Power Rating=62.5mW, Resistance=10kR, Resistance Tolerance=5%, Resistor Type="Thick Film", Temperature Coefficient=100ppm/°C, Voltage Rating=50V, Case/Package=0402, Construction=Rectangular, Depth=0.5mm, Features="Moisture Resistant", Height=0.016inch, Lead Free="Lead Free", Length=0.039inch, Military Standard=Not, Number of Terminations=2, Packaging="Tape and Reel", RoHS Compliant=Yes, Series=RC, Size Code=0402, Termination=SMD/SMT, Tolerance=5%, Width=0.02inch
R7 R11 R12 R15 R43: library part CMP-2100-03664-2, "RES 10K OHM 1% 1/10W 0603", Case Code (Imperial)=0603, Case Code (Metric)=1608, Max Operating Temperature=155°C, Max Power Dissipation=100mW, Min Operating Temperature=-55°C, Resistance=10kR, Resistance Tolerance=1%, Resistor Type="Thick Film", Temperature Coefficient=100ppm/°C, Voltage Rating=75V, Voltage Rating (DC)=50V, Case/Package=0603, Construction=Rectangular, Depth=0.8mm, Features="Moisture Resistant", Height=0.45mm, Lead Free="Lead Free", Lead Pitch=0.3mm, Length=1.6mm, Military Standard=Not, Number of Pins=2, Number of Terminations=2, Packaging="Tape and Reel", Power Rating=100mW, RoHS Compliant=Yes, Series=RC, Size Code=0603, Termination=SMD/SMT, Tolerance=1%, Weight=7.1E-05oz, Width=0.8mm
R8 R9 R13 R14: library part CMP-2000-03573-1, Manufacturer="Vishay Dale", Part Number=CRCW060375R0FKEA
R16: library part CMP-2002-07734-1, Manufacturer="Yageo / Phycomp", Part Number=RC0402FR-07523KL
R17 R18 R19 R20 R21 R23 R26 R34: library part CMP-1666-00005-4, "Chip Resistor, 10 KOhm, +/- 1%, 100 mW, -55 to 155 degC, 0603 (1608 Metric), RoHS, Tape and Reel", Manufacturer="Vishay Semiconductor", Max Operating Temperature="155 degC", Min Operating Temperature="-55 degC", Package Quantity=5000, Voltage Rating="75 V", ComponentLink1Description="Manufacturer URL", ComponentLink1URL=http://www.vishay.com/, ComponentLink2Description=Datasheet, ComponentLink2URL=https://datasheet.ciiva.com/11809/0900766b80d98afc-11809037.pdf, DatasheetVersion=06/2012, Height="0.45 mm", Length="1.55 mm", Mounting Technology="Surface Mount", PackageDescription="2-Pin Surface Mount Device, Body 1.575 x 0.85 mm", PackageReference=0603, Packaging="Tape and Reel", REACH SVHC=Unknown, RoHSCompliant=true
R24 R25 R35: library part CMP-2000-05023-1, "Chip Resistor, 1 KOhm, +/- 5%, 0.063 W, -55 to 155 degC, 0603 (1608 Metric), RoHS, Tape and Reel", Manufacturer=Yageo, Package Description="2-Pin Surface Mount Device, Body 1.6 x 0.8 mm", Package Reference=603, Power Rating=100mW, Resistance=1kohm, Resistance Tolerance=±5%, Resistor Case Style=0603[1608Metric], Resistor Element Type=ThickFilm, Temperature Coefficient=±100ppm/degC, Voltage Rating=50V, Automotive Qualification Standard=-, Datasheet URL=https://datasheet.ciiva.com/2452/pyu-rc0603-51-rohs-l-4-2452848.pdf, Datasheet Version="Rev. 4, 04/2009", Manufacturer URL=http://www.yageo.com/, MSL=MSL1-Unlimited, Packaging=CutTape, Product Range=RCSeries, SVHC=ToBeAdvised
R29 R30: library part CMP-2002-07913-2, "RES 100K OHM 5% 1/16W 0402", Case Code (Imperial)=0402, Case Code (Metric)=1005, Max Operating Temperature=155°C, Max Power Dissipation=63mW, Min Operating Temperature=-55°C, Package Quantity=1, Resistance=100kR, Resistance Tolerance=5%, Resistor Type="Thick Film", Temperature Coefficient=100ppm/°C, Voltage Rating=50V, Case/Package=0402, Construction=Rectangular, Depth=0.5mm, Features="Moisture Resistant", Height=0.016inch, Lead Free="Lead Free", Length=1mm, Military Standard=Not, Number of Terminations=2, Packaging="Tape and Reel", Power Rating=63mW, RoHS Compliant=Yes, Series=RC, Size Code=0402, Termination=SMD/SMT, Tolerance=5%, Width=0.02inch
R33 R36 R37 R38 R40 R41: library part CMP-2100-03662-2, "RES SMD 100K OHM 1% 1/10W 0603", Case Code (Imperial)=0603, Case Code (Metric)=1608, Max Operating Temperature=155°C, Max Power Dissipation=100mW, Min Operating Temperature=-55°C, Resistance=100kR, Resistance Tolerance=1%, Resistor Type="Thick Film", Temperature Coefficient=100ppm/°C, Voltage Rating=50V, Working Voltage=75V, Case/Package=0603, Construction=Rectangular, Depth=0.8mm, Features="Moisture Resistant", Height=0.45mm, Lead Free="Lead Free", Length=1.6mm, Military Standard=Not, Number of Pins=2, Number of Terminations=2, Packaging="Tape and Reel", Power Rating=100mW, REACH SVHC="No SVHC", RoHS Compliant=Yes, Series=RC, Technology="THICK FILM", Termination=SMD/SMT, Tolerance=1%, Voltage Rating (DC)=50V, Width=0.8mm
R39 R42: library part CMP-1659-00055-2, "RES SMD 47K OHM 1% 1/10W 0603", Case Code (Imperial)=0603, Case Code (Metric)=1608, Max Operating Temperature=155°C, Max Power Dissipation=100mW, Min Operating Temperature=-55°C, Package Quantity=1, Resistance=47kR, Resistance Tolerance=1%, Resistor Type="Thick Film", Temperature Coefficient=100ppm/°C, Voltage Rating=50V, Case/Package=0603, Construction=Rectangular, Depth=0.8mm, Features="Moisture Resistant", Height=0.022inch, Lead Free="Lead Free", Length=0.063inch, Military Standard=Not, Number of Pins=2, Number of Terminations=2, Packaging="Tape and Reel", Power Rating=100mW, RoHS Compliant=Yes, Series=RC, Size Code=0603, Technology="THICK FILM", Termination=SMD/SMT, Tolerance=1%, Voltage Rating (DC)=50V, Width=0.031inch
RV1: "10 kOhms 0.5W, 1/2W PC Pins Through Hole Trimmer Potentiometer Cermet 25.0 Turn Top Adjustment", Package="PV36W Bourns", Check_prices=https://www.snapeda.com/parts/PV36W103C01B00/Bourns/view-part/?ref=eda, DigiKey_Part_Number=118-PV36W103C01B00-ND, MF=Bourns, MP=PV36W103C01B00, Purchase-URL=https://pricing.snapeda.com/search?q=PV36W103C01B00&ref=eda, SnapEDA_Link=https://www.snapeda.com/parts/PV36W103C01B00/Bourns/view-part/?ref=snap
S1: "24 Pulse Incremental Mechanical Rotary Encoder w/ 6 mm Flat Shaft,Through Hole", Package=None, Check_prices=https://www.snapeda.com/parts/PEC12R-4225F-S0024/Bourns/view-part/?ref=eda, MF=Bourns, MP=PEC12R-4225F-S0024, SnapEDA_Link=https://www.snapeda.com/parts/PEC12R-4225F-S0024/Bourns/view-part/?ref=snap
U2: "No Description Available", Mfr_Name="Diodes Inc", RefDes=RefDes, Type=Type
U3 U6: library part CMP-0015-00074-2, "Dual Low-Noise High-Speed Audio Operational Amplifier, 10 to 30 V, 0 to 70 degC, 8-pin SOIC (D8), Green (RoHS & no Sb/Br)", Manufacturer="Texas Instruments", Total Supply Voltage(Max)(+5V is 5, +/-5V is 10)=30, Total Supply Voltage(Min)(+5V is 5, +/-5V is 10)=10, CMRR(Min)(dB)=70, Code_JEDEC=MS-012, ComponentLink1Description="Manufacturer URL", ComponentLink1URL=http://www.ti.com/, ComponentLink2Description=Datasheet, ComponentLink2URL=http://www.ti.com/lit/ds/symlink/ne5532.pdf, ComponentLink3Description="Package Specification", ComponentLink3URL=http://www.ti.com/litv/pdf/msoi002j, DatasheetVersion=SLOS075I, Eco-Plan="Green (RoHS & no Sb/Br)", GBW(Typ)(MHz)=10, IIB(Max)(pA)=800000, Iq per channel(Max)(mA)=4, Mounting Technology="Surface Mount", Number Of Channels=2, PackageDescription="8-Pin Plastic Small Outline, Body 4.9 x 3.9 mm, Pitch 1.27 mm", PackageReference=D0008A, PackageVersion="4040047-3/M, 06/2011", PartNumber=NE5532DR, Slew Rate(Typ)(V/us)=9, Sub Family="General Purpose Amplifier, High Supply Voltage Amplifier (>=30V), Low Noise Amp (<=10nV/rtHz)", Vio (25C)(Max)(mV)=4, Vn at 1kHz(Typ)(nV/rtHz)=5
U4: library part CMP-04918-000409-1, "IC REG BCK BST ADJ 3.6A 15VQFN", Case/Package=VQFN, Max Input Voltage=16V, Max Operating Temperature=125°C, Max Output Voltage=9V, Min Input Voltage=2V, Min Operating Temperature=-40°C, Min Output Voltage=2.5V, Output Current=2A, Quiescent Current=50uA, Switching Frequency=2.4MHz, Lead Free="Lead Free", Mount="Surface Mount", Number of Outputs=1, Number of Pins=15, Output Configuration=Positive, Output Type=Adjustable, Packaging="Tape and Reel", RoHS Compliant=Yes, Synchronous Rectifier=Yes, Topology=Buck-Boost
U5: library part CMP-04892-000035-1, "IC SWITCH SINGLE 16TSSOP", RoHS Compliant=Yes
U8: "No Description Available", Mfr_Name="Silicon Labs", RefDes=RefDes, Type=Type
X1: library part FM_OUT
U7: ki_description="Raspberry Pi Pico", ki_keywords="Raspberry Pi Pico"

## Via types
v1: diameter 0.508, hole 0.256, Top Layer to Bottom Layer, 15 vias

## Nets (pads, with @x,y where several pads share a name; then routed paths per layer and width w, separated by ;. In a path a pad name is that pad's centre, name@x,y a point inside that pad or via, vN(x,y) a via of type N, cw(c..) or ccw(c..) an arc to the next point about the centre after c; other vN are vias at no path point)
3V3_REG: 1.1 C5.2 C19.2 C20.2 J4.6 J4.7 J4.15 Q3.2 Q4.2 Q7.2 Q7.5 Q9.3 R17.2 R18.2 R19.2 R20.2 R21.2 R22.1 R28.1 R33.2 R40.2 U1.1 U5.2 U5.13 U7.36 U8.2 U8.4 U8.14 | length 12.4
  Top Layer w0.254: U7.36 16.325,24.965 C19.2 C20.2 ; R28.1 36.527,30.132 37.601,31.206 v1(37.601,31.9) ; Q7.5 v1(37.601,31.9) ; Q7.2 v1(37.601,31.9) ; R22.1 38.674,33.668 37.601,32.594 v1(37.601,31.9)
5V_OUT: C1.1 C3.2 CR1.1 R1.1 R27.1 R32.1 RV1.3 U2.4 U2.9 U3.8 U6.8 U7.39 | length 20.4
  Top Layer w0.4: U7.39 8.766,25.026 8.766,26.866 12.754,30.854 13.117,30.854 CR1.1 ; C1.1@23.8,37.625 23.805,37.63 25.3,37.63 27.782,37.63 U2.4 28.498,37.635 30.3,35.833 30.3,34.157 31.902,32.555 U2.9
ADC_MUX_0_5: U5.1 U7.29 | length 34.5
  Top Layer w0.254: v1(12.7,14.4) cw(c13,14.4) 13,14.7 18.1,14.7 ccw(c18.1,15.3) 18.7,15.3 18.7,21.8 cw(c19.1,21.8) 19.1,22.2 28.399,22.2 cw(c28.398,21.946) 28.569,22.133 ccw(c29,22.6) 29.431,22.134 cw(c29.602,21.946) 29.601,22.2 33.3,22.2 ccw(c33.3,22.94) 34.04,22.94 U7.29
  Bottom Layer w0.254: U5.1 ccw(c10.725,15.9) 10.6,15.9 10.6,15.2 ccw(c11.4,15.2) 11.4,14.4 v1(12.7,14.4)
ADC_MUX_1_5: U5.16 U7.27 | length 31.9
  Top Layer w0.254: v1(19.4,15.8) 19.1,16.1 19.1,21.3 cw(c19.6,21.3) 19.6,21.8 28.342,21.8 cw(c28.341,21.546) 28.475,21.762 ccw(c29,22.6) 29.525,21.762 cw(c29.659,21.546) 29.658,21.8 38.591,21.8 ccw(c38.591,22.329) 39.12,22.329 U7.27
  Bottom Layer w0.254: U5.16 19.106,16.025 19.331,15.8 v1(19.4,15.8)
ADC_MUX_2_5: U5.15 U7.26 | length 32.7
  Top Layer w0.254: v1(19.8,16.6) 19.8,20.946 cw(c20.3,20.946) 20.3,21.446 28.341,21.4 cw(c28.339,21.146) 28.444,21.378 ccw(c29,22.6) 29.557,21.378 cw(c29.661,21.146) 29.659,21.4 38.6,21.4 ccw(c38.6,22.4) 39.6,22.4 ; 39.6,22.3 cw(c40.18,22.3) 40.18,22.88 41.3,22.88 ccw(c41.3,23.24) 41.66,23.24 U7.26
  Bottom Layer w0.254: U5.15 ccw(c16.55,16.675) 16.55,16.6 v1(19.8,16.6)
AMP_MUTE: Q7.3 R22.2 | length 1.3
  Top Layer w0.254: Q7.3 R22.2
AMP_SHDN: Q7.6 R28.2 U7.21 | length 1.4
  Top Layer w0.254: R28.2 Q7.6
BTN_1: SW1.1 U7.16
BTN_2: SW2.1 U7.17
DC_OFFSET_2: R11.1 R15.1 RV1.2
ENC_A: C14.1 R19.1 S1.3 U7.9
ENC_B: C15.1 R18.1 S1.4 U7.10
ENC_BTN: S1.2 U7.11
GND: C1.2 C2.2 C3.1 C4.1 C5.1 C6.1 C7.2 C8.2 C10.2 C12.2 C13.2 C14.2 C15.2 C16.2 C17.2 C18.2 C19.1 C20.1 C23.2 D1.1 J3.1 J4.1 J4.14 J4.16 J4.17 J4.18 J4.19 J4.P1 J4.P2 J5.2 R23.1 R24.1 R25.1 R26.1 R29.2 R30.1 R34.1 R37.1 R38.1 R41.1 R43.1 RV1.1 S1.5 SW1.2 SW2.2 U1.2 U2.2 U2.11 U2.15 U3.4 U4.4 U4.6 U4.10 U4.15 U5.14 U6.4 U7.3 U7.8 U7.13 U7.18 U7.23 U7.28 U7.33 U7.38 U8.3 U8.10 U8.15
I2C_SCLK: U7.20 U8.11
I2C_SDIO: U7.19 U8.12
IR_LED_OUT: R35.2
IR_SENS_1: Q5.3 R20.1 U5.12 | length 15.4
  Bottom Layer w0.254: U5.12 20.575,18.625 cw(c20.575,18.3) 20.9,18.3 20.9,10.25 ccw(c21.7,10.25) R20.1 Q5.3@23.15,9.45
IR_SENS_2: Q6.3 R21.1 U5.11 | length 8.2
  Bottom Layer w0.254: U5.11 20.725,19.275 cw(c20.725,18.6) 21.4,18.6 21.4,18 ccw(c21.8,18) 21.461,17.787 ccw(c21.676,17.923) 21.656,17.67 ; 21.657,17.67 cw(c21.629,17.3) 22,17.3 R21.1 ; Q6.3@23.3,16.3 cw(c23.3,16.2) Q6.3
L_FILTERED_2: C7.1 L1.2 Q1.6 R39.1 | length 3.1
  Top Layer w0.254: L1.2@49.5,32.075 C7.1 49.5,35.17 R39.1
L_PWM: R2.1 U7.24 | length 3.1
  Top Layer w0.254: U7.24 46.74,27.974 ; R2.1@49.475,28.575 R2.1
LIN_AMP_2: J3.4 R4.2 | length 23.8
  Bottom Layer w0.254: R4.2 30.741,40.4 33.6,40.4 40.7,47.5 47.68,47.5 J3.4
LOUT_2_N: FB2.1 U2.3 | length 5.6
  Top Layer w0.254: FB2.1 24.9,42.7 26.098,41.502 26.098,40.102 26.923,39.277 26.923,39.057 27.076,38.905 U2.3
LOUT_2_P: FB1.1 U2.1 | length 0.1
  Top Layer w0.254: U2.1@27.732,41.5 U2.1
LOUT_RAD_2: R3.1 U8.1
MISO: J4.9 U1.4 U7.6 | length 26.5
  Top Layer w0.254: v1(6.7,14.2) 9.4,14.2 cw(c9.4,13.581) 10.019,13.581 10.019,8.881 ccw(c10.5,8.881) 10.5,8.4 18.2,8.4 cw(c18.2,7.8) 18.8,7.8 U7.6
  Bottom Layer w0.254: J4.9 6.431,14 6.631,14.2 v1(6.7,14.2) ; U1.4 18.74,3.8 v1(18.8,3.8)
MOSI: J4.8 U1.5 U7.5 | length 24.8
  Top Layer w0.254: v1(6.9,13.4) 9.2,13.4 cw(c9.2,13) 9.6,13 9.6,8.4 ccw(c10,8.4) 10,8 15.6,8 cw(c15.6,7.34) 16.26,7.34 U7.5 ; U7.5@16.426,5.354 16.592,5.188 16.592,3.688 U1.5
  Bottom Layer w0.254: J4.8 6.431,13 6.831,13.4 v1(6.9,13.4)
MUTE_5V_2: Q7.4 R27.2 U2.5 | length 12.9
  Top Layer w0.254: U2.5 28.498,36.365 29.773,35.09 29.773,33.327 32.1,31 33.85,31 35.4,32.55 Q7.4
NetC2_1: C2.1 C4.2 U2.13 | length 4.3
  Top Layer w0.254: U2.13 36.885,37.635 C4.2
NetC6_2: C6.2 R1.2 U2.6
NetC9_1: C9.1 R8.2 R9.2 | length 3.9
  Top Layer w0.254: R8.2 51.725,47.5 52.225,47 R9.2 52.375,47 53.642,48.267 53.667,48.267 C9.1
NetC9_2: C9.2 J3.5 | length 1.9
  Top Layer w0.254: J3.5 C9.2
NetC10_1: C10.1 U2.8
NetC11_1: C11.1 R13.2 R14.2 | length 2.8
  Top Layer w0.254: R14.2 C11.1 ; R14.2@38.2,44.775 R13.2
NetC11_2: C11.2 J3.3 | length 9.7
  Top Layer w0.254: C11.2 39.193,47.993 45.633,47.993 J3.3
NetC12_1: C12.1 C23.1 Q8.3 R31.1 U4.12-13 | length 9.2
  Top Layer w0.4: Q8.3 10.7,38.327 11.6,38.327 13.477,38.327 C23.1 ; C12.1 C23.1 ; U4.12-13 15.675,38.45 C23.1
NetC13_1: C13.1 R17.1 S1.1
NetC16_1: C16.1 C17.1 CR1.2 R16.2 U4.7-8 | length 13.7
  Top Layer w0.4: CR1.2@16.368,31.2 17.8,31.2 21.829,35.229 R16.2@21.829,37.2 ; U4.7-8 20.075,38.475 C16.1 21.85,38.45 R16.2
NetC18_1: C18.1 U4.3 | length 1.4
  Top Layer w0.254: U4.3 17.35,36.15 17.575,35.925 17.575,35.625 C18.1
NetC21_1: C21.1 X1.1
NetC21_2: C21.2 U8.6
NetC22_1: C22.1 U8.8
NetC22_2: C22.2 J6.1
NetD1_2: D1.2 R35.1
NetFB1_2: FB1.2 J1.1
NetFB2_2: FB2.2 J1.2
NetFB3_2: FB3.2 J2.1 | length 3.9
  Top Layer w0.254: FB3.2 32.6,49.04 J2.1
NetFB4_2: FB4.2 J2.2 | length 3.9
  Top Layer w0.254: J2.2 35.3,45.7 FB4.2
NetJ4_20: J4.20 Q9.2 | length 3.2
  Top Layer w0.4: v1(3.8,26.7) Q9.2
  Bottom Layer w0.4: J4.20 v1(3.8,26.7)
NetJ5_1: J5.1 Q8.2 R36.2 | length 16.3
  Top Layer w0.4: J5.1 10,36.458 Q8.2
  Bottom Layer w0.4: J5.1 10.56,33.9 18.19,33.9 18.195,33.905 21.25,30.85 21.3,30.85 21.5,30.65 R36.2
NetJ6_2: J6.2 U8.7
NetL1_1: L1.1 R2.2 | length 1
  Top Layer w0.254: R2.2 L1.1
NetL2_1: L2.1 R5.2 | length 1
  Top Layer w0.254: R5.2 L2.1
NetL4_1: L4.1 U4.9 | length 5.4
  Top Layer w0.254: U4.9 17.6,39.198 17.648,39.246 17.951,39.246 18.1,39.395 18.1,43.515 L4.1@18.285,43.7
NetL4_2: L4.2 U4.11 | length 5.4
  Top Layer w0.254: L4.2@15.915,43.7 16.1,43.515 16.1,39.395 16.249,39.246 16.552,39.246 16.6,39.198 U4.11
NetQ1_1: Q1.1 R3.2
NetQ1_4: Q1.4 R6.2
NetQ3_1: Q3.1 Q5.2 R23.2 | length 3.8
  Bottom Layer w0.254: Q3.1 cw(c25.8,12.45) 25.85,12.45 25.85,10.3 R23.2
NetQ4_1: Q4.1 Q6.2 R26.2 | length 3.9
  Bottom Layer w0.254: Q4.1 Q6.2 cw(c26.05,17.15) 26.05,17.2 R26.2
NetQ5_1: Q5.1 R24.2 | length 1.5
  Bottom Layer w0.254: Q5.1@25.85,8.5 R24.2
NetQ6_1: Q6.1 R25.2 | length 1.6
  Bottom Layer w0.254: Q6.1@26.05,15.2 R25.2
NetQ8_1: Q8.1 U7.40 | length 12.7
  Top Layer w0.4: U7.40 6.1,28.008 6.904,28.812 6.904,35.192 7.706,35.994 8.092,35.994 8.185,36.087 Q8.1
NetR4_1: R4.1 U2.7 | length 6
  Top Layer w0.254: U2.7 v1(29.138,33.825)
  Bottom Layer w0.254: v1(29.138,33.825) 29.175,33.825 29.7,34.35 R4.1
NetR7_1: R7.1 R11.2 U3.2 | length 3.6
  Top Layer w0.254: U3.2 48.27,38.587 R7.1 48.282,36.895 R11.2
NetR7_2: R7.2 R9.1 U3.1 U3.5 | length 10.4